# EAGLE board MINI_SAM_D51_r022_b001 (EAGLE 9.3.0)
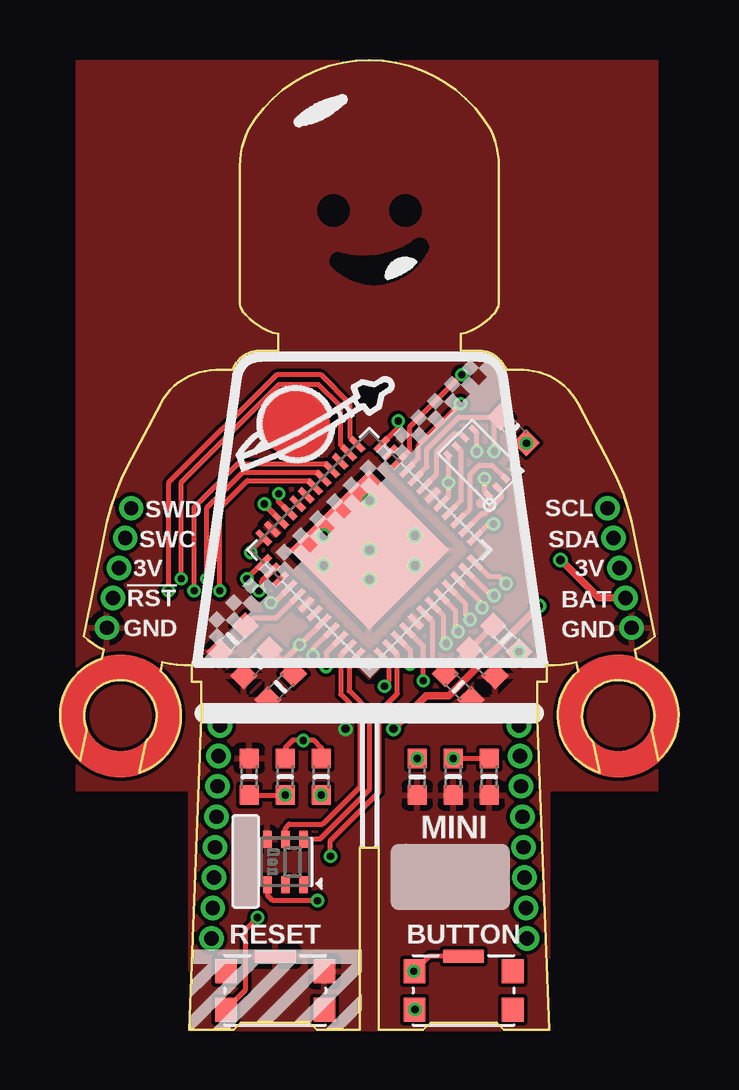
[diagram p0: board, top side]
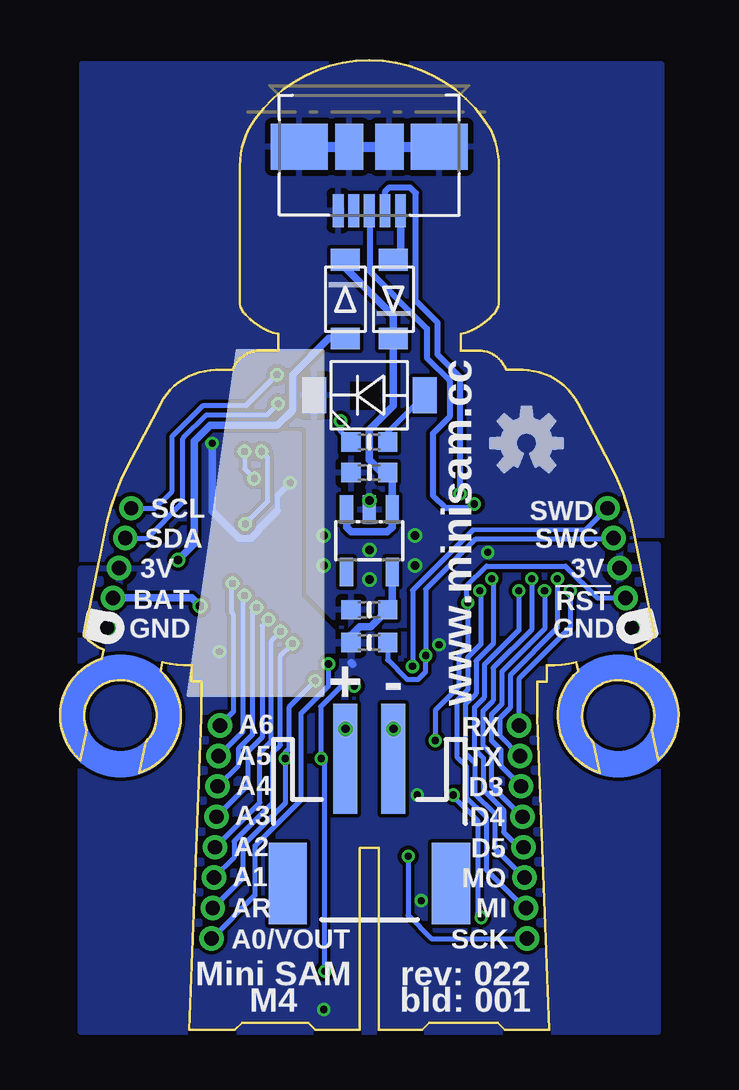
[diagram p1: board, bottom side, seen from below]

Size 25.78 x 40.42 mm. Coordinates in mm from the lower left corner, seen from the top.
Outline: 7.74,29.8 arc-40 7.49,30.3 7.49,36 arc-25 7.84,37.5 arc-120 17.94,37.5 arc-25 18.29,36 18.29,30.3 arc-40 18.04,29.8 arc-35 16.69,29 16.69,28.3 17.57,28.3 arc-63 18.59,27.5 19.27,27.5 arc-62 21.59,26.1 22.95,23.5 arc-18 23.95,20.54 24.79,16.4 arc-15 23.95,15.83 24.03,15.46 arc-122 24.93,11.24 24.66,12.52 arc125 22.95,14.54 arc125 22.21,12 22.48,10.72 arc-122 21.59,14.95 21.51,15.31 arc-15 20.29,15.2 20.29,14.5 19.89,14.5 19.89,13 20.39,0 18.49,0 18.19,0.3 15.44,0.3 15.14,0 13.29,0 13.29,7.6 12.49,7.6 12.49,0 10.69,0 10.39,0.3 7.54,0.3 7.24,0 5.39,0 5.89,13 5.89,14.5 5.49,14.5 5.49,15.2 arc-15 4.27,15.31 4.19,14.95 arc-122 3.29,10.72 3.56,12 arc125 2.83,14.54 arc125 1.12,12.52 0.85,11.24 arc-122 1.75,15.46 1.82,15.83 arc-15 0.99,16.4 1.83,20.54 arc-18 2.82,23.5 4.19,26.1 arc-62 6.5,27.5 7.19,27.5 arc-63 8.21,28.3 9.09,28.3 9.09,29 arc-35 7.74,29.8
Copper layers (1*16): Top 0.035559375mm / dielectric 1.6mm / Bottom 0.035559375mm
Design rules "oshpark-2layer-tented *": minimum track width 6mil, minimum drill 0.3mm, track to track 6mil, track to pad 6mil, pad to pad 6mil, via to via 6mil, smd to smd 6mil, copper to edge 0.5mil, drill to drill 6mil, minimum pad ring 5mil, minimum via ring 5mil, stop-mask expansion 2.5mil, vias tented up to drill 20mil, thermal gap 10mil
tRestrict: area 11.3,31.2 to 15.2,32.9; area 11.1,33.9 to 11.7,34.4; area 14.1,33.9 to 14.7,34.4; area 12.4,25.9 to 13.6,26.9; area 13.5,26.8 to 13.6,26.9; 5 lines
bRestrict: area 12.4,25.9 to 13.7,27

## Footprints (pad centres in the part's own frame; a part is rotated, then mirrored left to right if it is on the bottom)
JST-2-SMD = smd 1 x 4.6: 1 -1,-3.7; 2 1,-3.7 | smd 1.6 x 3.4: NC1 -3.4,1.5; NC2 3.4,1.5
_0603MP = smd 0.8 x 0.8: 1 -0.762,0; 2 0.762,0
SOD-123FL = smd 0.91 x 1.22: A 1.637,0; C -1.637,0
MOLEX_47346-1001 = smd 0.45 x 1.38: P1 1.3,-2.66; P2 0.65,-2.66; P3 0,-2.66; P4 -0.65,-2.66; P5 -1.3,-2.66 | smd 2.375 x 1.9: PAD1 -2.913,0; PAD4 2.913,0 | smd 1.175 x 1.9: PAD2 -0.838,0; PAD3 0.838,0
REVERSE_MOUNT_LED = smd 1 x 1.5: A 2.3,0; C -2.3,0
APA102_2020 = smd 0.7 x 0.35: 1 -0.95,-0.75; 2 -0.95,0; 3 -0.95,0.75; 4 0.95,0.75; 5 0.95,0; 6 0.95,-0.75
KMS_SWITCH = smd 0.9 x 1: 1 -2.05,-0.8; 2 -2.05,0.8; 4 2.05,0.8; 5 2.05,-0.8 | smd 1.7 x 0.55: 3 0,1.425
TQFN48_7MM = smd 0.25 x 0.75: 1 -2.75,-3.475; 2 -2.25,-3.475; 3 -1.75,-3.475; 4 -1.25,-3.475; 5 -0.75,-3.475; 6 -0.25,-3.475; 7 0.25,-3.475; 8 0.75,-3.475; 9 1.25,-3.475; 10 1.75,-3.475; 11 2.25,-3.475; 12 2.75,-3.475; 25 2.75,3.475; 26 2.25,3.475; 27 1.75,3.475; 28 1.25,3.475; 29 0.75,3.475; 30 0.25,3.475; 31 -0.25,3.475; 32 -0.75,3.475; 33 -1.25,3.475; 34 -1.75,3.475; 35 -2.25,3.475; 36 -2.75,3.475 | smd 0.75 x 0.25: 13 3.475,-2.75; 14 3.475,-2.25; 15 3.475,-1.75; 16 3.475,-1.25; 17 3.475,-0.75; 18 3.475,-0.25; 19 3.475,0.25; 20 3.475,0.75; 21 3.475,1.25; 22 3.475,1.75; 23 3.475,2.25; 24 3.475,2.75; 37 -3.475,2.75; 38 -3.475,2.25; 39 -3.475,1.75; 40 -3.475,1.25; 41 -3.475,0.75; 42 -3.475,0.25; 43 -3.475,-0.25; 44 -3.475,-0.75; 45 -3.475,-1.25; 46 -3.475,-1.75; 47 -3.475,-2.25; 48 -3.475,-2.75 | smd 4.7 x 4.7: THERMAL 0,0
USON8 = smd 0.35 x 0.25: 1 -1.2,0.75; 2 -1.2,0.25; 3 -1.2,-0.25; 4 -1.2,-0.75; 5 1.2,-0.75; 6 1.2,-0.25; 7 1.2,0.25; 8 1.2,0.75
1X8_HEADER_1.27MM = drill 0.6 pad 1.016: P$1 -4.445,0; P$2 -3.175,0; P$3 -1.905,0; P$4 -0.635,0; P$5 0.635,0; P$6 1.905,0; P$7 3.175,0; P$8 4.445,0
1X5_HEADER_1.27MM = drill 0.6 pad 1.016: P$1 -2.54,0; P$2 -1.27,0; P$3 0,0; P$4 1.27,0; P$5 2.54,0
SOT23-5 = smd 0.55 x 1.2: 1 -0.95,-1.3; 2 0,-1.3; 3 0.95,-1.3; 4 0.95,1.3; 5 -0.95,1.3

## Placement (x,y rotation side)
BATT_CONN  [JST-2-SMD]  12.89,7.6 180 bottom
C1  4.7µF  [_0603MP]  7.19,16.3 225 top
C2  10µF  [_0603MP]  8.19,15.3 225 top
C3  0.1µF  [_0603MP]  9.19,14.3 225 top
C4  0.1µF  [_0603MP]  7.89,10.55 270 top
C5  0.1µF  [_0603MP]  16.39,10.55 270 top
C6  4.7µF  [_0603MP]  17.89,10.55 270 top
C7  0.1µF  [_0603MP]  16.59,14.3 315 top
C8  10µF  [_0603MP]  17.59,15.3 315 top
C9  10µF  [_0603MP]  12.89,23.23 0 bottom
C10  10µF  [_0603MP]  12.89,17.51 180 bottom
D1  MBR120  [SOD-123FL]  11.89,30.45 90 bottom
D2  MBR120  [SOD-123FL]  13.89,30.45 270 bottom
FB  Impedence: 50 ohm @ 20 MHz, 220 Ohm @ 100 MHz; low DC resistance  [_0603MP]  18.59,16.3 135 top
J1  MOLEX_47346-100147346  [MOLEX_47346-1001]  12.89,36.8 0 bottom
LED  VLRK31Q1R2-GS08  [REVERSE_MOUNT_LED]  12.89,26.45 0 bottom
R1  1KΩ  [_0603MP]  9.39,10.55 270 top
R2  10KΩ  [_0603MP]  10.89,10.55 270 top
R3  10KΩ  [_0603MP]  14.89,10.55 90 top
R4  100kΩ  [_0603MP]  18.89,25 135 top
R5  120Ω  [_0603MP]  12.89,24.5 180 bottom
R6  1KΩ  [_0603MP]  12.89,16.14 180 bottom
RGB  AP102-2020  [APA102_2020]  9.39,7 90 top
SW1  KMS233GLFG  [KMS_SWITCH]  8.96,1.65 0 top
SW2  KMS233GLFG  [KMS_SWITCH]  16.81,1.65 0 top
U1  ATSAMD51G_TQFN48  [TQFN48_7MM]  12.89,20 45 top
U2  QSPI NOR FLASH 2MiB 2x3mm USON (W25Q16JVUXIM)  [USON8]  17.54,23.65 135 top
U$1  1X8_HEADER_1.27MM  [1X8_HEADER_1.27MM]  6.49,8.25 267.8 top
U$2  1X8_HEADER_1.27MM  [1X8_HEADER_1.27MM]  19.29,8.25 92.2 top
U$3  [OSHW-LOGO-S]  6.34,24.45 0 bottom
U$4  1X5_HEADER_1.27MM  [1X5_HEADER_1.27MM]  2.46,19.25 258.5 top
U$5  1X5_HEADER_1.27MM  [1X5_HEADER_1.27MM]  23.31,19.25 101.5 top
VREG  AP2112K-3.3V  [SOT23-5]  12.89,20.39 180 bottom

## Library data of the parts
BATT_CONN = SparkFun-Connectors; PROD_ID: CONN-11443
C1-C10 FB R1-R6 RGB U1 U2 = microbuilder
D1 D2 = adafruit
J1 LED SW1 SW2 U$1 U$2 U$4 U$5 = Shockley_Custom
U$3 = SparkFun-Aesthetics
VREG = SparkFun-PowerIC; PROD_ID: VREG-12457

## Nets
!RESET: R1.1 R2.1 U1.40 U$4.P$4
A0: U1.3 U$2.P$1
A1: U1.7 U$2.P$3
A2: U1.8 U$2.P$4
A3: U1.9 U$2.P$5
A4: U1.10 U$2.P$6
A5: U1.11 U$2.P$7
A6: U1.12 U$2.P$8
AREF: C5.1 C6.1 U1.4 U$2.P$2
BAT: BATT_CONN.2 D2.A U$5.P$2
BUTTON_D6: R3.2 SW2.2 SW2.3 U1.1
D3: U1.28 U$1.P$3
D4: U1.29 U$1.P$4
D5: U1.30 U$1.P$5
D14: R5.2 U1.24
DOTSTAR_CLK: RGB.5 U1.47
DOTSTAR_DATA: RGB.6 U1.48
GND: BATT_CONN.1 C1.2 C2.2 C3.2 C4.1 C5.2 C6.2 C7.2 C8.2 C9.1 C10.2 J1.P5 J1.PAD1 J1.PAD2 J1.PAD3 J1.PAD4 LED.C R3.1 RGB.4 SW1.3 SW1.4 U1.5 U1.18 U1.35 U1.42 U1.THERMAL U2.4 U$4.P$5 U$5.P$1 VREG.2
MISO: U1.38 U$1.P$7
MOSI: U1.37 U$1.P$6
N$3: LED.A R5.1
N$4: C4.2 R1.2 SW1.1
N$9: C1.1 U1.41
QSPI_CS: R4.2 U1.20 U2.1
QSPI_DATA[0]: U1.13 U2.5
QSPI_DATA[1]: U1.14 U2.2
QSPI_DATA[2]: U1.15 U2.3
QSPI_DATA[3]: U1.16 U2.7
QSPI_SCK: U1.19 U2.6
RX_D0: U1.25 U$1.P$1
SCK: U1.2 U$1.P$8
SCL: U1.22 U$5.P$5
SDA: U1.21 U$5.P$4
SWCLK: R6.1 U1.45 U$4.P$2
SWDIO: U1.46 U$4.P$1
TX_D1: U1.26 U$1.P$2
USBD+ [USB_DATA]: J1.P3 U1.34
USBD- [USB_DATA]: J1.P2 U1.33
VDD: C2.1 C3.1 C10.1 FB.1 R2.2 R4.1 R6.2 RGB.3 SW2.1 U1.17 U1.36 U1.44 U2.8 U$4.P$3 U$5.P$3 VREG.5
VDDANA: C7.1 C8.1 FB.2 U1.6
VHI: C9.2 D1.C D2.C VREG.1 VREG.3
VSW: U1.43
VUSB: D1.A J1.P1

## Tracks (layer width: path | path; a pad name or v marks a point on that pad's centre or on a via)
!RESET  (via drill 0.3)
  Top 0.203: R2.1 10.89,11.76 10.59,12.06 v10.14,12.06 9.69,12.06 9.39,11.76 R1.1 | U1.40 8.92,17.8 v8.79,17.8
  Bottom 0.203: v10.14,12.06 10.14,13.32 9.15,14.31 9.15,15.67 8.79,16.03 v8.79,17.8 8.79,18.05 8.82,18.08 8.82,18.52 8.01,19.33 4.72,19.33 3.39,18 U$4.P$4
A0  (via drill 0.3)
  Top 0.203: U1.3 14.59,15.82 v14.59,15.25
  Bottom 0.203: U$2.P$1 17.66,5.61 17.66,7.66 15.73,9.59 15.73,13.2 14.59,14.34 v14.59,15.25
A1  (via drill 0.3)
  Top 0.203: U1.7 15.98,17.26 15.98,16.21 v16.09,16.1
  Bottom 0.203: v16.09,16.1 16.6,15.59 16.6,11.87 16.93,11.54 16.93,9.45 18.52,7.86 18.52,7.18 U$2.P$3
A2  (via drill 0.3)
  Top 0.203: U1.8 16.48,17.47 16.47,16.72 v16.59,16.6
  Bottom 0.203: v16.59,16.6 16.97,16.22 16.97,12.04 17.45,11.55 17.45,9.47 U$2.P$4
A3  (via drill 0.3)
  Top 0.203: U1.9 16.89,17.77 16.89,17.3 v17.09,17.1
  Bottom 0.203: U$2.P$5 17.93,10.22 17.93,11.62 17.36,12.19 17.36,16.83 v17.09,17.1
A4  (via drill 0.3)
  Top 0.203: U1.10 17.59,17.77 v17.59,17.6
  Bottom 0.203: U$2.P$6 18.34,11.03 18.34,11.73 17.76,12.31 17.76,17.43 v17.59,17.6
A5  (via drill 0.3)
  Top 0.203: U1.11 17.97,18.1 v18.09,18.1
  Bottom 0.203: U$2.P$7 18.17,12.42 18.17,18.02 v18.09,18.1
A6  (via drill 0.3)
  Top 0.203: v18.59,18.6 18.3,18.89 17.89,18.89 U1.12
  Bottom 0.203: U$2.P$8 18.54,13.27 18.54,17.3 18.62,17.38 18.62,18.57 v18.59,18.6
AREF  (via drill 0.3)
  Top 0.203: C5.1 C6.1 | v15.14,14.55 15.14,15.98 U1.4
  Bottom 0.203: v15.14,14.55 16.24,13.45 16.24,11.73 16.39,11.58 C5.1 16.39,9.45 18.17,7.67 18.17,6.32 U$2.P$2
  other vias: 16.39,11.31
BAT  (via drill 0.35)
  Top 0.305: v13.89,12.55 15.26,13.92 16.21,13.92 v19.95,17.66 | U$5.P$2 22.44,18 v20.86,19.59
  Bottom 0.305: D2.A 14.58,28.81 16.09,27.3 16.09,25.83 16.72,25.2 19.52,25.2 20.19,24.53 20.19,20.26 v20.86,19.59 | BATT_CONN.2 v13.89,12.55 | U$5.P$2 20.29,18 v19.95,17.66
BUTTON_D6  (via drill 0.3)
  Top 0.203: v13.52,14.32 13.7,14.51 13.7,15.3 U1.1 | SW2.3 15.39,3.08 SW2.2 v14.74,2.45
  Bottom 0.203: v13.52,14.32 14.07,14.32 14.92,13.47 14.92,11.34 R3.2 14.74,11.16 v14.74,2.45
  other vias: 14.89,11.31
D3  (via drill 0.3)
  Top 0.203: U1.28 | U1.28 11.06,23.6 7.42,23.6 5.59,21.77 v5.59,18.3
  Bottom 0.203: U$1.P$3 7.4,10.99 7.4,11.65 7.79,12.05 7.79,13.15 7.37,13.58 7.37,14.94 5.59,16.72 v5.59,18.3
D4  (via drill 0.3)
  Top 0.203: U1.29 10.71,23.24 7.61,23.24 6.12,21.75 v6.12,18.8
  Bottom 0.203: U$1.P$4 7.78,10.15 7.78,11.48 8.15,11.86 8.15,13.3 7.73,13.72 7.73,15.08 6.12,16.68 v6.12,18.8
D5  (via drill 0.3)
  Top 0.203: U1.30 10.35,22.89 7.81,22.89 6.66,21.74 v6.66,18.3
  Bottom 0.203: U$1.P$5 6.66,7.62 7.29,8.24 7.29,9.16 8.13,10 8.13,11.34 8.51,11.71 8.51,13.45 8.08,13.87 8.08,15.23 6.66,16.65 v6.66,18.3
D14  (via drill 0.3)
  Top 0.203: v14.09,25.37 14.09,25.1 13.4,24.41 U1.24
  Bottom 0.203: R5.2 14.09,24.94 v14.09,25.37
DOTSTAR_CLK
  Top 0.203: RGB.5 9.39,8.39 9.55,8.57 10.95,8.57 12.49,10.11 12.49,13.18 11.69,13.98 11.69,15.62 U1.47
DOTSTAR_DATA
  Top 0.203: 12.34,9.46 10.83,7.95 RGB.6 | U1.48 12.04,15.27 12.04,14.13 12.89,13.28 12.89,10.02 12.34,9.46 | 12.34,9.46
GND  (via drill 0.35)
  Bottom 0.203: BATT_CONN.1 v11.89,12.55
  Bottom 0.406: J1.PAD4 J1.PAD3 J1.PAD2 J1.PAD1
  other vias: 12.89,20 14.79,19.35 10.99,19.35 12.89,22.06 14.79,20.6 10.99,20.6 12.89,18.77
  pour Top (rank 2): 5.39,0 20.39,0 20.39,10 24.89,10 24.89,40.35 0.69,40.35 0.69,10 5.39,10
  pour Bottom (rank 2): 0.69,40.25 24.89,40.25 24.89,10 20.39,10 20.39,0 5.39,0 5.39,10 0.69,10
MISO  (via drill 0.3)
  Top 0.203: v8.29,18.3 8.42,18.43 8.42,18.71 U1.38
  Bottom 0.203: U$1.P$7 6.39,5.05 8.02,6.68 8.02,8.88 8.84,9.71 8.84,10.98 9.22,11.35 9.22,13.74 8.79,14.17 8.79,15.52 8.24,16.08 8.24,18.25 v8.29,18.3
MOSI  (via drill 0.3)
  Top 0.203: U1.37 8.48,19.49 v7.79,18.8
  Bottom 0.203: U$1.P$6 6.43,6.35 7.66,7.58 7.66,9.03 8.49,9.85 8.49,11.13 8.86,11.51 8.86,13.6 8.44,14.02 8.44,15.38 7.73,16.09 7.73,18.74 v7.79,18.8
N$3
  Bottom 0.203: LED.A 12.13,24.91 R5.1
N$4  (via drill 0.3)
  Top 0.203: v8.23,4.69 7.72,4.18 7.72,1.65 SW1.1 | C4.2 R1.2
  Bottom 0.203: v8.23,4.69 8.37,4.84 8.37,8.73 9.39,9.75 R1.2
  other vias: 9.39,9.79
N$9
  Top 0.203: U1.41 9.28,17.45 9.28,17.44 8.98,17.15 8.56,17.15 8.04,17.15 C1.1
QSPI_CS  (via drill 0.3)
  Top 0.203: U2.1 17.69,22.44 v17.69,22.98 | v18.09,24.1 18.09,25.28 R4.2 16.62,25.54 15.29,24.21 15.29,23.46 U1.20
  Bottom 0.203: v18.09,24.1 18.09,23.38 v17.69,22.98
QSPI_DATA[0]  (via drill 0.3)
  Top 0.203: v17.37,24.1 17.37,24.88 U2.5 | U1.13 17.86,21.08 v18.06,21.08
  Bottom 0.203: v17.37,24.1 17.11,23.85 17.11,22.03 v18.06,21.08
QSPI_DATA[1]
  Top 0.203: U2.2 18.39,22.45 18.39,22.19 17.71,21.51 17.58,21.51 U1.14
QSPI_DATA[2]
  Top 0.203: U1.15 17.09,21.73 17.09,23.15 17.48,23.54 18,23.54 U2.3
QSPI_DATA[3]
  Top 0.203: U1.16 16.73,22.07 16.73,22.75 16.73,24.11 U2.7
QSPI_SCK
  Top 0.203: U1.19 15.69,23.16 15.69,24.11 16.44,24.85 16.69,24.85 U2.6
RX_D0  (via drill 0.3)
  Top 0.203: v4.52,18.3 4.52,22.79 9.03,27.3 10.88,27.3 12.08,26.1 12.08,24.7 U1.25
  Bottom 0.203: v4.52,18.3 4.52,16.77 6.66,14.63 U$1.P$1
SCK  (via drill 0.3)
  Top 0.203: U1.2 14.06,15.65 14.06,14.02 13.3,13.26 13.3,9.92 11.27,7.89 v11.27,7.24
  Bottom 0.203: v11.27,7.24 11.27,4.77 10.31,3.81 U$1.P$8
SCL  (via drill 0.3)
  Top 0.203: U1.22 14.58,24.16 14.58,25.14 v16.74,27.3
  Bottom 0.203: v16.74,27.3 18.03,26.01 19.84,26.01 21.11,24.74 21.11,22.45 21.82,21.74 U$5.P$5
SDA  (via drill 0.3)
  Top 0.203: U1.21 14.93,23.81 14.93,24.35 16.67,26.09 v16.69,26.09
  Bottom 0.203: v16.69,26.09 17.16,25.62 19.68,25.62 20.65,24.65 20.65,21.99 22.15,20.5 U$5.P$4
SWCLK  (via drill 0.3)
  Top 0.203: U1.45 10.54,15.88 v10.54,15.6
  Bottom 0.203: U$4.P$2 2.75,20.46 8.44,20.46 10.54,18.37 v10.54,15.6 10.54,14.92 10.85,14.61 11.32,14.61 12.13,15.42 R6.1
SWDIO  (via drill 0.3)
  Top 0.203: U1.46 11.09,15.72 v11.09,15.15
  Bottom 0.203: v11.09,15.15 11.09,18.32 8.59,20.82 3.88,20.83 U$4.P$1
TX_D1  (via drill 0.3)
  Top 0.203: U1.26 11.69,24.38 11.69,25.96 10.75,26.9 9.13,26.9 5.05,22.82 v5.05,18.8
  Bottom 0.203: U$1.P$2 7.44,12.25 7.44,13.01 7.01,13.43 7.01,14.79 5.05,16.75 v5.05,18.8
U1_PIN_1_INDICATOR
  pour Top: 12.89,14.6 13.39,15.1 12.39,15.1
USBD+  (via drill 0.3)
  Top 0.254: U1.34 8.51,21.91 v8.52,21.92
  Bottom 0.254: J1.P3 12.88,34.13 12.88,31.62 10.49,29.23 10.49,28 9.54,27.05 9.54,25.55 10.24,24.85 10.24,22.26 9.73,21.76 8.68,21.76 v8.52,21.92
USBD-  (via drill 0.3)
  Top 0.203: U1.33 9.11,22.01 v9.11,22.34
  Bottom 0.254: J1.P2 12.24,34.92 12.05,35.11 11.2,35.11 10.95,34.87 10.95,30.39 10.04,29.47 10.04,28.14 9.11,27.21 v9.11,22.34
VDD  (via drill 0.3)
  Top 0.203: v19.44,24.45 | R4.1 v19.44,24.45 | U2.8 16.19,23.94 v16.19,22.8 16.19,22.24 U1.17 | SW2.1 v14.79,0.85 | U1.36 7.95,19.98 v7.95,19.9 | v10.73,5.39 8.87,5.39 8.64,5.62 RGB.3
  Top 0.254: U1.44 v9.99,16.05 9.25,15.31
  Top 0.305: C2.1 9.25,15.31 C3.1
  Bottom 0.254: 16.72,21.63 16.72,22.27 v16.19,22.8
  Bottom 0.305: VREG.5 11.94,17.7 C10.1 12.84,16.8 13.29,16.8 13.65,16.44 R6.2 13.5,16.14 | 16.72,21.63 17.49,20.86 17.49,20.79 17.82,20.46 18.28,20.46 19.44,21.62 v19.44,24.45 | 13.65,15.3 13.59,15.24
  other vias: 19.13,15.76 10.89,9.79
  pour Bottom: 0.89,-0.05 0.89,20.2 8.79,20.2 10.6,18.39 11.08,18.39 11.08,16.45 14.3,16.45 15.82,17.97 15.82,24.8 20.44,24.8 20.44,21.1 22.34,19.2 24.89,19.2 24.89,-0.05
VDDANA
  Top 0.203: U1.6 15.51,17.04 15.51,15.38 C7.1
  Top 0.254: FB.2 C8.1 C7.1
VHI
  Bottom 0.305: VREG.3 13.84,20.95 13.64,20.75 12.14,20.75 11.94,20.95 VREG.1 11.94,23.04 C9.2 12.37,23.23 12.89,23.75 12.89,25 11.89,26 D1.C 11.89,29.75 13.89,31.75 D2.C
VUSB
  Bottom 0.305: D1.A 11.59,31.98 J1.P1
(copper drawn outside any net)
  shapes: Bottom circle x2, Top circle x4

## Text on the board
bPlace: SWD | SCL | SWC | SDA | 3V | 3V | !RST | BAT | GND | GND | - | + | RX | A6 | TX | A5 | D3 | A4 | D4 | A3 | D5 | A2 | MO | A1 | MI | AR | SCK | A0/VOUT
tNames: SWD | SCL | SWC | SDA | 3V | 3V | !RST | BAT | GND | GND | MINI | RESET | BUTTON
bNames: www.minisam.cc | rev: 022 / bld: 001 | Mini SAM / M4
tStop: STATUS | SAM | D51
tDocu: MEM
bDocu: µUSB | LED | R5